# Altium PCB FAN_Unit_240316.PcbDoc
Units mil, origin at the board's own origin, x right, y up, seen from the top; angles counter-clockwise.
Board outline 4448.82 x 2165.35 mil, 2 copper layers (Top Layer, Bottom Layer); 48 components, 41 nets, 274 pads, 393 vias.
Unrouted connection lines stored in the file: 5.
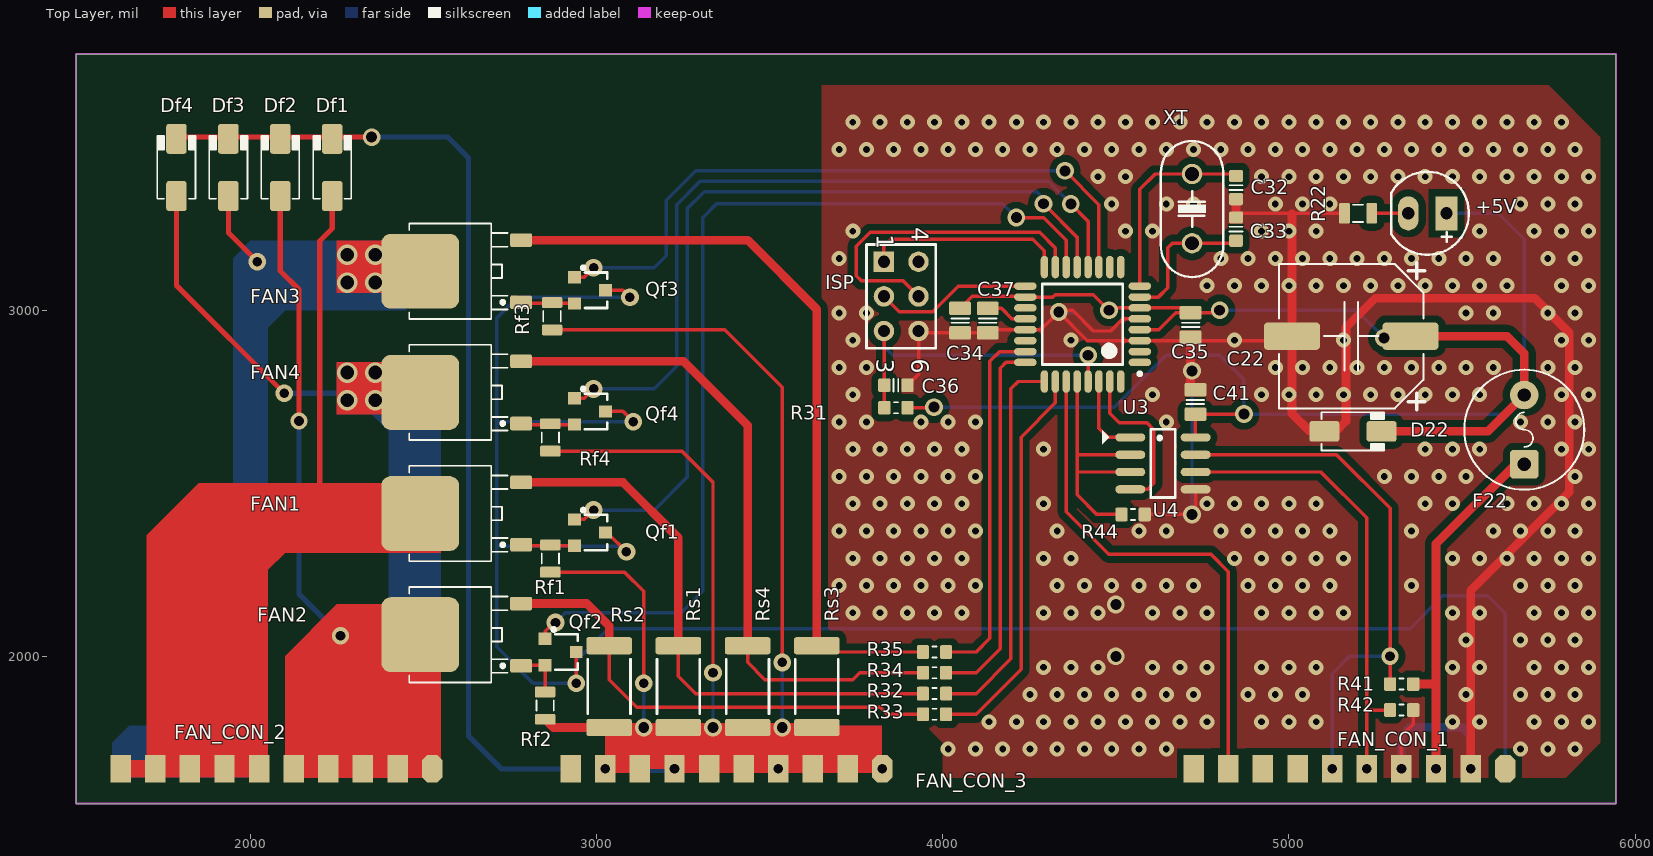
[diagram p0: Top Layer view]
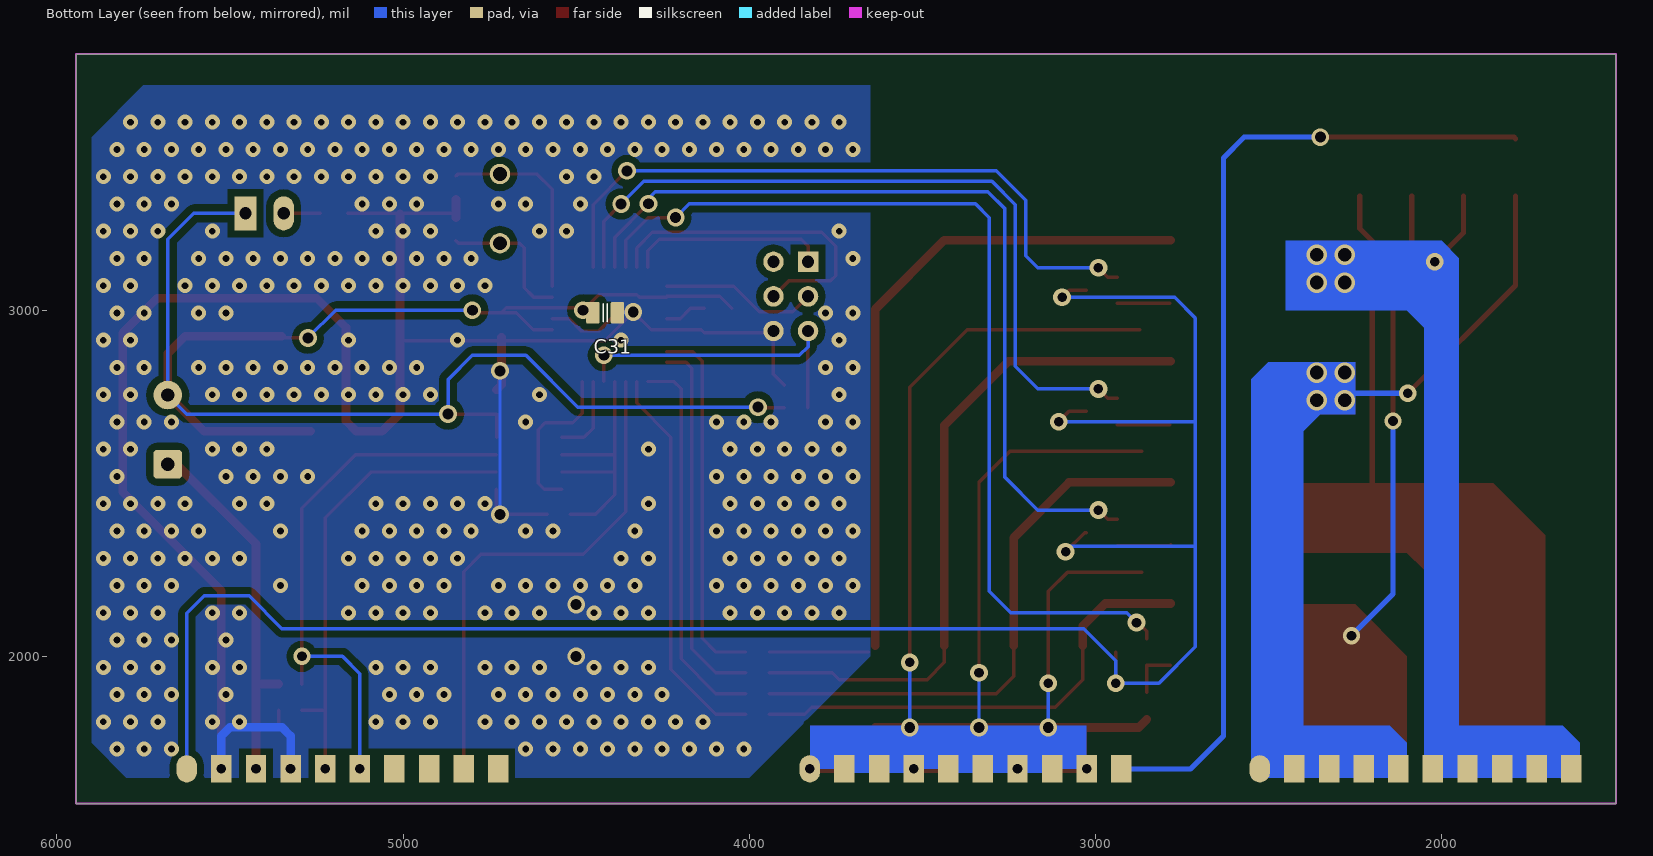
[diagram p1: Bottom Layer view, seen from below]
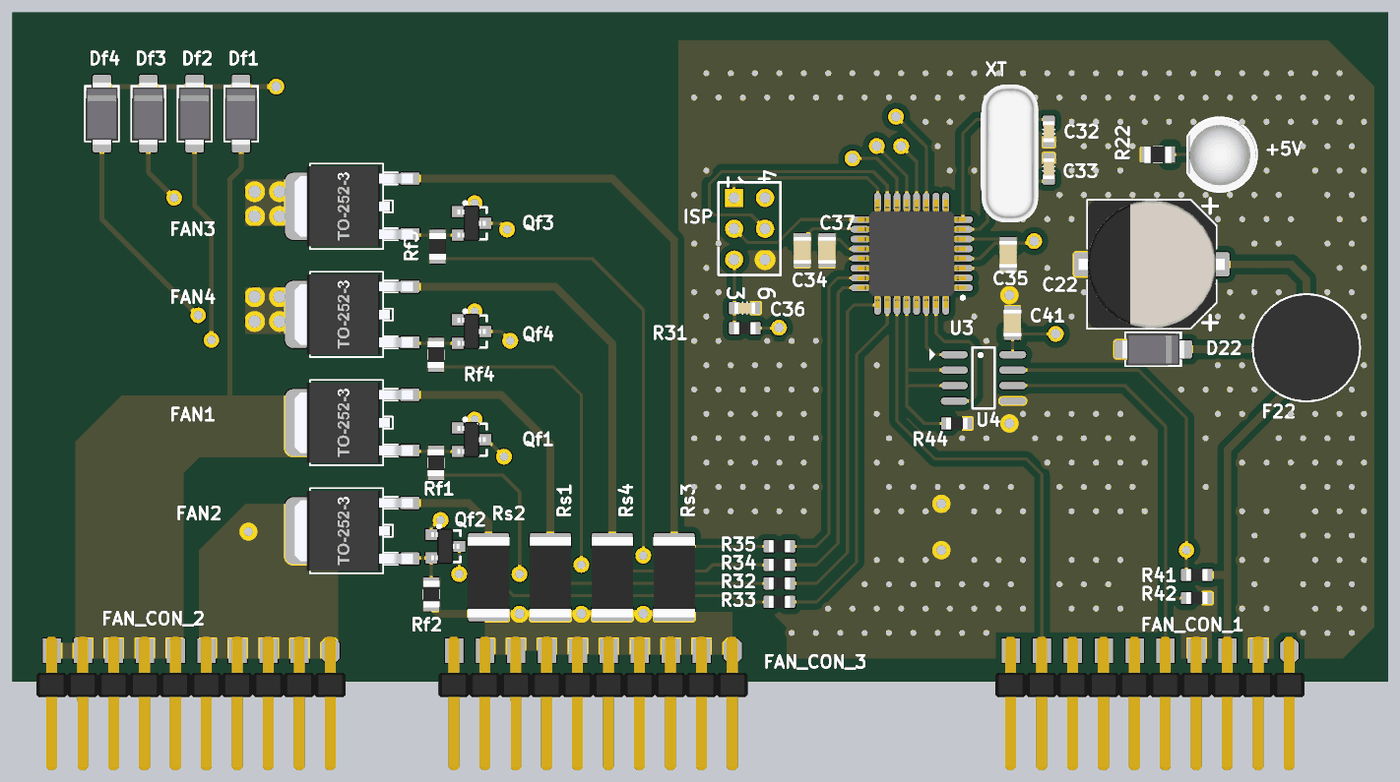
[diagram p2: 3D render of the assembled board from above, using the file's embedded part models]

## Layer stack, top to bottom
Top Solder: solder mask 0.4, Solder Resist, Dk 3.5
Top Layer: signal copper 1.4
Dielectric 1: dielectric 12.6, FR-4, Dk 4.8
Bottom Layer: signal copper 1.4
Bottom Solder: solder mask 0.4, Solder Resist, Dk 3.5

## Board outline
1496.06,1574.8 5944.88,1574.8 5944.88,3740.16 1496.06,3740.16

## Design rules (kind name [scope] priority, off if disabled: settings)
Clearance [All] p1: gap=10 except(8: Arc-SMDPad Track-SMDPad SMDPad-SMDPad; 20: Arc-Poly Track-Poly SMDPad-Poly THPad-Poly Via-Poly Fill-Poly Poly-Poly)
PlaneConnect [All] p1: planeconnectstyle=Direct reliefexpansion=20 reliefentries=4 reliefconductorwidth=10 reliefairgap=10
PolygonConnect [All] p1: connectstyle=Direct reliefconductorwidth=10 reliefentries=4 polygonreliefangle="90 Angle" airgapwidth=10
RoutingVias [All] p1: holewidth=28 width=50 viastyle="Through Hole" minholewidth=28 minwidth=50 maxholewidth=196.85 maxwidth=196.85
SolderMaskExpansion [All] p1: expansion=4
Width [All] p1: maxlimit=50 minlimit=10 preferedwidth=25
29 further rules are at their usual default settings.

## Components (designator, comment, footprint, x,y, rotation, side; value= is the part's Value field where it differs from the comment)
+5V "Led" "LED 5mm RED" 5400,3280 r180 top
C22 "2200uF/35V" CAP_ELEC_SIZE_G 5180,2925 r90 top
C31 "Cap" CAPC2012N_F#1 4416.22,2992.6 r180 bottom
C32 "CAP NP" CAPC1608N 4847.22,3354.35 r270 top
C33 "CAP NP" CAPC1608N 4847.22,3234.35 r90 top
C34 "Cap" CAPC2012N_F#2 4050,2970 r270 top
C35 "Cap" CAPC2012N_F#2 4715.83,2957.76 r270 top
C36 "CAP NP" CAPC1608N 3864.72,2783.35 r180 top
C37 "Cap" CAPC2012N_F#2 4130,2970 r270 top
C41 "100nF/104" CAPC2012N_F#2 4730,2735 r270 top
D22 "Diode" DO-214AC 5185,2650 r0 top
Df1 "Diode" DO-214AC 2236.22,3412.6 r90 top
Df2 "Diode" DO-214AC 2086.22,3412.6 r90 top
Df3 "Diode" DO-214AC 1936.22,3412.6 r90 top
Df4 "Diode" DO-214AC 1786.22,3412.6 r90 top
F22 "1.5A" FUSE_SR-5-BK 5680,2655 r90 top
FAN1 "NFET" TO-252 2636.22,2412.6 r90 top
FAN2 "NFET" TO-252 2636.22,2062.6 r90 top
FAN3 "NFET" TO-252 2636.22,3112.6 r90 top
FAN4 "NFET" TO-252 2636.22,2762.6 r90 top
FAN_CON_1 "Header 10X2A" OMC10 5625,1675 r180 top
FAN_CON_2 "Header 10X2A" OMC10 2525,1675 r180 top
FAN_CON_3 "Header 10X2A" OMC10 3825,1675 r180 top
ISP "Header 3X2A" HDR2X3_CEN 3830,3140 r270 top
Qf1 "C828" "SOT23 TOP" 2981.22,2357.6 r270 top
Qf2 "C828" "SOT23 TOP" 2896.22,2012.6 r270 top
Qf3 "C828" "SOT23 TOP" 2981.22,3057.6 r270 top
Qf4 "C828" "SOT23 TOP" 2981.22,2707.6 r270 top
R22 "Res_0805_1k" RESC2012N_F 5200,3280 r180 top
R31 "Res" RESC1608N_ZERO 3864.72,2718.35 r0 top
R32 "Res" RESC1608N_ZERO 3976.22,1892.6 r180 top
R33 "Res" RESC1608N_ZERO 3976.22,1832.6 r180 top
R34 "Res" RESC1608N_ZERO 3976.22,1952.6 r180 top
R35 "Res" RESC1608N_ZERO 3976.22,2012.6 r180 top
R41 "1k" RESC1608N_ZERO 5325.75,1920 r0 top
R42 "1k" RESC1608N_ZERO 5325.75,1845 r180 top
R44 "330R" RESC1608N_ZERO 4550,2410 r180 top
Rf1 "Res" RESC2012N_F 2866.22,2282.6 r90 top
Rf2 "Res" RESC2012N_F 2851.22,1857.6 r90 top
Rf3 "Res" RESC2012N_F 2871.22,2982.6 r90 top
Rf4 "Res" RESC2012N_F 2866.22,2632.6 r90 top
Rs1 "Res" RESC6332N 3236.22,1912.6 r90 top
Rs2 "Res" RESC6332N 3036.22,1912.6 r90 top
Rs3 "Res" RESC6332N 3636.22,1912.6 r90 top
Rs4 "Res" RESC6332N 3436.22,1912.6 r90 top
U3 "ATmega88PA" 32PIN 4403.94,2959.41 r180 top
U4 "MAX485" SO-8 4636.22,2557.6 r0 top
XT "20MHz" XT2 4720.22,3293.6 r90 top

## Footprints (in the part's own frame and the unit in brackets; to place one, negate y for a bottom-side part, rotate by r counter-clockwise, add the part's x,y. Pads: shape width x height; smd on the part's side, far side on the other; paste and mask are expansions set on the pad)
32PIN [mm]
  oval 1.65x0.55 smd: 1(-4.2,2.8) 2(-4.2,2) 3(-4.2,1.2) 4(-4.2,0.4) 5(-4.2,-0.4) 6(-4.2,-1.2) 7(-4.2,-2) 8(-4.2,-2.8) 17(4.2,-2.8) 18(4.2,-2) 19(4.2,-1.2) 20(4.2,-0.4) 21(4.2,0.4) 22(4.2,1.2) 23(4.2,2) 24(4.2,2.8)
  oval 0.55x1.65 smd: 9(-2.8,-4.2) 10(-2,-4.2) 11(-1.2,-4.2) 12(-0.4,-4.2) 13(0.4,-4.2) 14(1.2,-4.2) 15(2,-4.2) 16(2.8,-4.2) 25(2.8,4.2) 26(2,4.2) 27(1.2,4.2) 28(0.4,4.2) 29(-0.4,4.2) 30(-1.2,4.2) 31(-2,4.2) 32(-2.8,4.2)
  silkscreen extent -4.33,-2.95 2.95,3.75, body extent -4.5,-4.5 4.5,4.5, height 1.6
CAP_ELEC_SIZE_G [mm] "Capacitor, polarized, aluminum can; 10.0x10.2mm DxH"
  round 0.635 on Mech14: 0(0,0)
  rrect25% 2x4.1 smd: 1(0,-4.35) 2(0,4.35)
  silkscreen extent -5.4,-5.4 5.4,5.3, body extent -5.25,-6 5.25,6, height 10.5
CAPC1608N [mm] "Chip Capacitor, Body 1.6x0.8mm, 0603, IPC Medium Density"
  round 0.254 on Mech14: 0(0,0)
  rrect25% 0.9x1 smd: 1(-0.85,0) 2(0.85,0)
  Top Layer pour cut-out: -0.4,0.6 0.4,0.6 0.4,-0.6 -0.4,-0.6
  silkscreen extent -0.18,-0.48 0.18,0.48, body extent -0.85,-0.45 0.85,0.45, height 0.89
CAPC2012N_F#1 [mm] "Chip Capacitor, Body 2.0x1.2mm, 0805, IPC Medium Density, for Flex circuits"
  round 0.254 on Mech14: 0(0,0)
  rrect25% 1.2x1.4 on Bottom Solder: 1(-0.9,0) 1(0.9,0)
  rrect25% 1x1.6 smd paste-1: 1(-0.9,0) 2(0.9,0)
  rrect25% 1x1.4 on Bottom Paste: 1(-0.9,0) 1(0.9,0)
  Top Layer pour cut-out: -0.4,0.8 0.4,0.8 0.4,-0.8 -0.4,-0.8
  silkscreen extent -0.15,-0.65 0.15,0.65, body extent -1.1,-0.72 1.1,0.73, height 1.34
CAPC2012N_F#2 [mm] "Chip Capacitor, Body 2.0x1.2mm, 0805, IPC Medium Density, for Flex circuits"
  round 0.254 on Mech14: 0(0,0)
  rrect25% 1.2x1.4 on Top Solder: 1(-0.9,0) 1(0.9,0)
  rrect25% 1x1.6 smd paste-1: 1(-0.9,0) 2(0.9,0)
  rrect25% 1x1.4 on Top Paste: 1(-0.9,0) 1(0.9,0)
  Top Layer pour cut-out: -0.4,0.8 0.4,0.8 0.4,-0.8 -0.4,-0.8
  silkscreen extent -0.15,-0.65 0.15,0.65, body extent -1.1,-0.72 1.1,0.73, height 1.34
DO-214AC [mm] "JEDEC DO214 variation AC. SMA"
  round 0.508 on Mech14: 0(0,0)
  rrect25% 2.2x1.5 smd: A(-2.1,0) K(2.1,0)
  silkscreen extent -2.3,-1.4 2.3,1.4, body extent -2.6,-1.3 2.6,1.3, height 2.42
FUSE_SR-5-BK [mm]
  round 0.5 on Mech14: 0(0,0)
  rrect25% 2.1x2.1 hole 0.965: 1(-2.54,0)
  round 2.1 hole 0.965: 2(2.54,0)
  silkscreen extent -4.4,-4.4 4.4,4.4, body extent -4.35,-4.32 4.35,4.32, height 8.29
HDR2X3_CEN [mm] "Connector; Header; 3x2 Position"
  rect 1.5x1.5 hole 0.9: 1(0,0)
  round 1.5 hole 0.9: 2(2.54,0) 3(5.08,0) 4(0,2.54) 5(2.54,2.54) 6(5.08,2.54)
  silkscreen extent -1.27,-1.27 6.35,3.81
"LED 5mm RED" [mm]
  rect 1.6x2.5 hole 0.9: A(-1.397,0)
  oval 1.5x2.5 hole 0.9: K(1.397,0)
  silkscreen extent -3.04,-3.05 2.64,3.04, body extent -2.94,-2.97 2.48,3.05, height 12.31
OMC10 [mm]
  oct 1.5x2 smd: 1(0,0)
  rect 1.5x2 smd: 2(2.54,0) 3(5.08,0) 4(7.62,0) 5(10.16,0) 6(12.7,0) 7(15.24,0) 8(17.78,0) 9(20.32,0) 10(22.86,0)
  oval 1.5x2 smd far side: 11(0,0)
  rect 1.5x2 smd far side: 12(2.54,0) 13(5.08,0) 14(7.62,0) 15(10.16,0) 16(12.7,0) 17(15.24,0) 18(17.78,0) 19(20.32,0) 20(22.86,0)
  body extent -1.24,-1.18 24.16,9.82, height 2.33
RESC1608N_ZERO [mm] "Chip Resistor, Body 1.6x0.8mm, 0603, IPC Medium Density"
  round 0.254 on Mech14: 0(0,0)
  rrect25% 0.9x1 smd: 1(-0.85,0) 2(0.85,0)
  Top Layer pour cut-out: -0.4,0.6 0.4,0.6 0.4,-0.6 -0.4,-0.6
  silkscreen extent -0.15,-0.41 0.15,0.41, body extent -0.87,-0.47 0.88,0.48, height 0.54
RESC2012N_F [mm] "Chip Resistor, Body 2.0x1.2mm, 0805, IPC Medium Density"
  round 0.254 on Mech14: 0(0,0)
  rrect25% 1x1.3 on Top Solder: 1(-1,0) 1(1,0)
  rrect25% 0.8x1.5 smd paste-1: 1(-1,0) 2(1,0)
  rrect25% 0.8x1.3 on Top Paste: 1(-1,0) 1(1,0)
  Top Layer pour cut-out: -0.6,0.75 0.6,0.75 0.6,-0.75 -0.6,-0.75
  silkscreen extent -0.38,-0.64 0.38,0.64, body extent -1.1,-0.67 1.1,0.68, height 0.69
RESC6332N [mm] "Chip Resistor, Body 6.3x3.2mm, 2512, IPC Medium Density"
  round 1 on Mech14: 0(0,0)
  rrect25% 1.25x3.35 smd: 1(-3,0) 2(3,0)
  silkscreen extent -2,-1.58 2,1.58, body extent -3.3,-1.7 3.3,1.7, height 0.69
SO-8 [mm] "8-Pin Small Outline Integrated Circuit 1.27 mm Pitch, IPC Medium Density"
  oval 2.2x0.6 smd: 1(-2.4,1.905) 2(-2.4,0.635) 3(-2.4,-0.635) 4(-2.4,-1.905) 5(2.4,-1.905) 6(2.4,-0.635) 7(2.4,0.635) 8(2.4,1.905)
  silkscreen extent -4.44,-2.5 0.9,2.5, body extent -1.95,-2.45 1.95,2.45, height 1.75
"SOT23 TOP" [mm]
  rect 0.9x0.95 smd: 1(-0.965,-1.143) 2(0,1.143) 3(0.965,-1.143)
  silkscreen extent -1.77,-0.63 1.3,1.25, body extent -1.46,-1.17 1.46,1.17, height 1
TO-252 [mm] "D-PAK/TO-252-AA; 3 Leads (1 Cropped); Body 10.3 (inc. leads) x 6.7 mm (LxW max)"
  round 0.5 on Mech14: 0(0,0)
  rrect25% 1x1.6 smd: 1(-2.285,-3.7) 3(2.285,-3.7)
  rrect25% 5.5x5.7 smd: 4(0,3.7)
  silkscreen extent -3.5,-2.7 3.5,4.5, body extent -3.3,-3.95 3.3,5.76, height 2.31
XT2 [mm]
  round 1.5 hole 1: 1(-2.54,0) 2(2.54,0)
  silkscreen extent -5.03,-2.29 4.96,2.29, body extent -5.93,-2.36 5.42,2.29, height 3.5

## Part data
C22: library part CP4, "Cap 1000uF/16V - 220uF/50V"
C41: library part "CAP NP"
F22: library part Fuse
FAN_CON_1 FAN_CON_2 FAN_CON_3: "Header, 10-Pin, Dual row"
ISP: "Header, 3-Pin, Dual row"
Qf1 Qf2 Qf3 Qf4: library part NPN, "Transistor C828 C1815...."
R22: library part Res
R41 R42 R44: library part Res, "Tro dan"
U3: library part ATmega48/168/328, "ATmega48/168/328"
U4: "RS232 - RS485 (Same sn75176)"
XT: library part Crystal

## Via types
v1: diameter 43.31, hole 19.68, Top Layer to Bottom Layer, tented both sides, 341 vias
v2: diameter 51.18, hole 31.5, Top Layer to Bottom Layer, 19 vias
v3: diameter 50, hole 28, Top Layer to Bottom Layer, 14 vias
v4: diameter 51.18, hole 27.56, Top Layer to Bottom Layer, 11 vias
v5: diameter 59.06, hole 39.37, Top Layer to Bottom Layer, 8 vias

## Nets (pads, with @x,y where several pads share a name; then routed paths per layer and width w, separated by ;. In a path a pad name is that pad's centre, name@x,y a point inside that pad or via, vN(x,y) a via of type N, cw(c..) or ccw(c..) an arc to the next point about the centre after c; other vN are vias at no path point)
+3V3: FAN_CON_1.7 FAN_CON_1.17
+5V_IN: F22.1 FAN_CON_1.3 FAN_CON_1.13 R41.2 | length 1061.1
  Top Layer w25: R41.2 5420,1920 ; v3(5425,1675) 5425,2325 5655,2555 F22.1
+12V_IN: FAN_CON_1.1 FAN_CON_1.11 Qf1.2 Qf2.2 Qf3.2 Qf4.2 | length 6057.2
  Top Layer w10: v4(2941.22,1922.6) Qf2.2 ; Qf1.2 3031.22,2357.6 v4(3086.22,2302.6) v4@3081.22,2302.6 ; Qf4.2 3076.22,2707.6 v4(3106.22,2677.6) ; Qf3.2 3076.22,3057.6 v4(3096.22,3037.6)
  Bottom Layer w10: v4(3086.22,2302.6) 3071.22,2317.6 2711.22,2317.6 ; v4(3096.22,3037.6) 2771.22,3037.6 2711.22,2977.6 2711.22,2672.6 ; v4(3106.22,2677.6) 2716.22,2677.6 2711.22,2672.6 ; FAN_CON_1.11 5625,2125 5575,2175 5445,2175 5350,2080 3033.62,2080 2941.22,1987.6 v4(2941.22,1922.6) 2816.22,1922.6 2711.22,2027.6 2711.22,2317.6 ; 2711.22,2317.6 2711.22,2672.6
+48V_IN: Df1.K Df2.K Df3.K Df4.K FAN_CON_3.10 FAN_CON_3.20 | length 2874.9
  Top Layer w15: Df4.K 1790.94,3500 2236.22,3500 v2(2350,3500)
  Bottom Layer w15: v2(2350,3500) 2570,3500 2630,3440 2630,1770 2725,1675 FAN_CON_3.20
ADC_FAN1: R32.1 U3.25 | length 1114.3
  Top Layer w10: R32.1 4096.22,1892.6 4196.22,1992.6 4196.22,2772.6 4217.68,2794.05 U3.25
ADC_FAN2: R33.1 U3.26 | length 1142.8
  Top Layer w10: R33.1 4096.22,1832.6 4226.22,1962.6 4226.22,2633.62 4325.2,2732.6 U3.26
ADC_FAN3: R34.1 U3.24 | length 1074.8
  Top Layer w10: R34.1 4096.22,1952.6 4166.22,2022.6 4166.22,2832.6 4182.8,2849.17 U3.24
ADC_FAN4: R35.1 U3.23 | length 1057.1
  Top Layer w10: R35.1 4096.22,2012.6 4136.22,2052.6 4136.22,2852.6 4164.29,2880.67 U3.23
AREF: C37.1@4130,3005.43 U3.20 | length 121.1
  Top Layer w10: C37.1@4130,3005.43 4169.57,3005.43 4199.84,2975.16 U3.20
FAN1_CONTROL: Qf1.1 U3.13 | length 2443.8
  Top Layer w10: Qf1.1 2964.22,2395.6 v4(2991.22,2422.6) ; v2(4291.34,3307.72) 4291.34,3307.09 4388.19,3210.24 U3.13
  Bottom Layer w10: v4(2991.22,2422.6) 3166.22,2422.6 3261.22,2517.6 3261.22,3292.6 3311.22,3342.6 4271.22,3342.6 v2@4298.72,3315.1 ; v2@4291.34,3307.09 v2(4291.34,3307.72)
FAN1_OUT: Df1.A FAN1.4 FAN_CON_2.6 FAN_CON_2.7 FAN_CON_2.8 FAN_CON_2.9 FAN_CON_2.10 | length 1353.2
  Top Layer w15: 2180,2400 2200,2420 2200,3200 2236.22,3236.22 Df1.A
  Top Layer w50: FAN_CON_2.10 FAN_CON_2.9 FAN_CON_2.8 FAN_CON_2.7 FAN_CON_2.6
FAN2_CONTROL: Qf2.1 U3.14 | length 2792
  Top Layer w10: Qf2.1 2851.22,2072.6 2876.22,2097.6 v4(2881.22,2097.6) ; v2(4212.6,3267.72) 4291.34,3267.72 4356.69,3202.36 U3.14
  Bottom Layer w10: v4(2881.22,2097.6) 2909.61,2125.98 3244.61,2125.98 3307.09,2188.46 3307.09,3267.72 3346.46,3307.09 4173.23,3307.09 v2(4212.6,3267.72)
FAN2_OUT: Df2.A FAN2.4 FAN_CON_2.1 FAN_CON_2.2 FAN_CON_2.3 FAN_CON_2.4 FAN_CON_2.5 | length 2095.1
  Top Layer w15: Df2.A 2086.22,3113.78 2140,3060 v3(2140,2680)
  Top Layer w50: FAN_CON_2.5 FAN_CON_2.4 FAN_CON_2.3 FAN_CON_2.2 FAN_CON_2.1 FAN2.4@2525,2028.15
  Bottom Layer w15: v3(2140,2680) 2140,2180 v3(2260,2060)
FAN3_CONTROL: Qf3.1 U3.11 | length 1956.3
  Top Layer w10: Qf3.1 2964.22,3095.6 v4(2991.22,3122.6) ; v2(4353.31,3402.6) 4451.18,3304.72 U3.11
  Bottom Layer w10: v4(2991.22,3122.6) 3166.22,3122.6 3201.22,3157.6 3201.22,3317.45 3286.37,3402.6 v2(4353.31,3402.6)
FAN3_OUT: Df3.A FAN3.4 FAN_CON_2.16 FAN_CON_2.17 FAN_CON_2.18 FAN_CON_2.19 FAN_CON_2.20 | length 618.5
  Top Layer w15: Df3.A 1936.22,3223.78 v3(2020,3140)
  Bottom Layer w50: FAN_CON_2.20@1636.22,1662.6 1648.62,1675 FAN_CON_2.19 FAN_CON_2.18 FAN_CON_2.17 FAN_CON_2.16
  other v5: 2280,3080 2360,3080 2280,3160 2360,3160
FAN4_CONTROL: Qf4.1 U3.12 | length 2197.4
  Top Layer w10: Qf4.1 2964.22,2745.6 v4(2991.22,2772.6) ; v2(4370.08,3307.09) 4419.69,3257.48 U3.12
  Bottom Layer w10: v4(2991.22,2772.6) 3166.22,2772.6 3231.22,2837.6 3231.22,3305.02 3298.79,3372.6 4304.57,3372.6 v2(4370.08,3307.09)
FAN4_OUT: Df4.A FAN4.4 FAN_CON_2.11 FAN_CON_2.12 FAN_CON_2.13 FAN_CON_2.14 FAN_CON_2.15 | length 1278.4
  Top Layer w15: Df4.A 1786.22,3071.28 v3(2097.5,2760)
  Bottom Layer w15: v3(2097.5,2760) 2260,2760 v5(2280,2740)
  Bottom Layer w50: FAN_CON_2.15 FAN_CON_2.14 ; FAN_CON_2.14@2236.22,1675 FAN_CON_2.13 FAN_CON_2.12 FAN_CON_2.11
  other v5: 2360,2740 2280,2820 2360,2820
GND: C22.2 C31.2 C32.2 C33.2 C34.2 C35.2 C36.1 C37.2 C41.1@4730,2770.43 D22.A FAN_CON_1.2 FAN_CON_1.4 FAN_CON_1.12 FAN_CON_1.14 ISP.6 R22.2 R42.1 R44.1 U3.3 U3.5 U3.21 U4.5 | length 6479.3
  Top Layer w10: C36.1 3930,2815.16 ISP.6@3930,2934.57 ; ISP.6@3935.43,2934.57 C34.2 C37.2 4139.09,2943.66 U3.21 4283.66,2943.66 v2(4335,2995) ; U3.5 4520.16,2975.16 4485,2940 4435,2940 4375,3000 4340,3000 v2(4335,2995) ; R44.1 v2(4720,2410) 4730.71,2420.71 U4.5 ; C33.2@4859.41,3280 R22.2 ; C22.2@4995.91,2912.17 4715.83,2912.17 U3.3 4417.83,2912.17 v2(4335,2995) ; v3(5325,1675) 5325,1770 5359.21,1804.21 R42.1
  Top Layer w25: C35.2 4715.83,2912.17 4715.83,2784.61 C41.1@4730,2770.43 ; C33.2 C32.2 ; 5008.74,3278.72 5008.74,3149.61 C22.2 5008.74,2701.26 5060,2650 D22.A 5135,2650 5165,2680 5165,2950 5250,3035 5710,3035 5810,2935 5810,2755.91 5810,2475 5525,2190 5525,2125.99 5525,1889.76 v3(5525,1675)
  Bottom Layer w10: v2(4335,2995) 4337.4,2992.6 C31.2 ; v2(4720,2410) v2(4720,2825)
  Bottom Layer w25: v3(5325,1675) 5325,1770 5350,1795 5500,1795 5525,1770 v3(5525,1675)
  other v1: 4015.75,1732.28 4094.49,1732.28 4173.23,1732.28 4251.97,1732.28 4330.71,1732.28 4409.45,1732.28 4488.19,1732.28 4566.93,1732.28 4645.67,1732.28 5669.29,1732.28 5748.03,1732.28 5826.77,1732.28 4133.86,1811.02 4212.6,1811.02 4291.34,1811.02 4370.08,1811.02 4448.82,1811.02 4527.56,1811.02 4606.3,1811.02 4685.04,1811.02 4763.78,1811.02 4921.26,1811.02 5000,1811.02 5078.74,1811.02 5472.44,1811.02 5551.18,1811.02 5708.66,1811.02 5787.4,1811.02 5866.14,1811.02 4251.97,1889.76 4330.71,1889.76 4409.45,1889.76 4488.19,1889.76 4566.93,1889.76 4645.67,1889.76 4724.41,1889.76 4881.89,1889.76 4960.63,1889.76 5039.37,1889.76 5511.81,1889.76 5669.29,1889.76 5748.03,1889.76 5826.77,1889.76 4291.34,1968.51 4370.08,1968.51 4448.82,1968.51 4606.3,1968.51 4685.04,1968.51 4763.78,1968.51 4921.26,1968.51 5000,1968.51 5078.74,1968.51 5472.44,1968.51 5551.18,1968.51 5708.66,1968.51 5787.4,1968.51 5866.14,1968.51 5511.81,2047.25 5669.29,2047.25 5748.03,2047.25 5826.77,2047.25 3740.16,2125.99 3818.9,2125.99 3897.64,2125.99 3976.38,2125.99 4055.12,2125.99 4291.34,2125.99 4370.08,2125.99 4448.82,2125.99 4606.3,2125.99 4685.04,2125.99 4763.78,2125.99 4921.26,2125.99 5000,2125.99 5078.74,2125.99 5157.48,2125.99 5472.44,2125.99 5551.18,2125.99 5708.66,2125.99 5787.4,2125.99 5866.14,2125.99 3700.79,2204.73 3779.53,2204.73 3858.27,2204.73 3937.01,2204.73 4015.75,2204.73 4094.49,2204.73 4330.71,2204.73 4409.45,2204.73 4488.19,2204.73 4566.93,2204.73 4645.67,2204.73 4724.41,2204.73 4881.89,2204.73 4960.63,2204.73 5039.37,2204.73 5118.11,2204.73 5354.33,2204.73 5669.29,2204.73 5748.03,2204.73 5826.77,2204.73 3740.16,2283.47 3818.9,2283.47 3897.64,2283.47 3976.38,2283.47 4055.12,2283.47 4291.34,2283.47 4370.08,2283.47 4842.52,2283.47 4921.26,2283.47 5000,2283.47 5078.74,2283.47 5157.48,2283.47 5472.44,2283.47 5551.18,2283.47 5629.92,2283.47 5708.66,2283.47 5787.4,2283.47 5866.14,2283.47 3700.79,2362.21 3779.53,2362.21 3858.27,2362.21 3937.01,2362.21 4015.75,2362.21 4094.49,2362.21 4330.71,2362.21 4566.93,2362.21 4645.67,2362.21 4803.15,2362.21 4881.89,2362.21 4960.63,2362.21 5039.37,2362.21 5118.11,2362.21 5354.33,2362.21 5590.55,2362.21 5669.29,2362.21 5748.03,2362.21 5826.77,2362.21 3740.16,2440.95 3818.9,2440.95 3897.64,2440.95 3976.38,2440.95 4055.12,2440.95 4291.34,2440.95 4763.78,2440.95 4842.52,2440.95 4921.26,2440.95 5000,2440.95 5078.74,2440.95 5393.7,2440.95 5472.44,2440.95 5629.92,2440.95 5708.66,2440.95 5787.4,2440.95 5866.14,2440.95 3700.79,2519.69 3779.53,2519.69 3858.27,2519.69 3937.01,2519.69 4015.75,2519.69 4094.49,2519.69 5275.59,2519.69 5354.33,2519.69 5433.07,2519.69 5511.81,2519.69 5826.77,2519.69 3740.16,2598.43 3818.9,2598.43 3897.64,2598.43 3976.38,2598.43 4055.12,2598.43 4291.34,2598.43 5393.7,2598.43 5472.44,2598.43 5551.18,2598.43 5787.4,2598.43 5866.14,2598.43 3700.79,2677.17 3779.53,2677.17 3937.01,2677.17 4015.75,2677.17 4094.49,2677.17 4645.67,2677.17 5669.29,2677.17 5748.03,2677.17 5826.77,2677.17 3740.16,2755.91 4606.3,2755.91 4921.26,2755.91 5000,2755.91 5078.74,2755.91 5157.48,2755.91 5236.22,2755.91 5314.96,2755.91 5393.7,2755.91 5472.44,2755.91 5551.18,2755.91 5787.4,2755.91 5866.14,2755.91 3700.79,2834.65 3779.53,2834.65 4960.63,2834.65 5039.37,2834.65 5118.11,2834.65 5196.85,2834.65 5275.59,2834.65 5354.33,2834.65 5433.07,2834.65 5511.81,2834.65 5590.55,2834.65 5748.03,2834.65 5826.77,2834.65 3740.16,2913.39 4370.08,2913.39 4842.52,2913.39 5157.48,2913.39 5787.4,2913.39 5866.14,2913.39 3700.79,2992.13 3779.53,2992.13 5511.81,2992.13 5590.55,2992.13 5748.03,2992.13 5826.77,2992.13 4763.78,3070.87 4842.52,3070.87 4921.26,3070.87 5000,3070.87 5078.74,3070.87 5157.48,3070.87 5236.22,3070.87 5314.96,3070.87 5393.7,3070.87 5472.44,3070.87 5551.18,3070.87 5629.92,3070.87 5787.4,3070.87 5866.14,3070.87 3700.79,3149.61 4803.15,3149.61 4881.89,3149.61 4960.63,3149.61 5039.37,3149.61 5118.11,3149.61 5196.85,3149.61 5275.59,3149.61 5354.33,3149.61 5433.07,3149.61 5511.81,3149.61 5590.55,3149.61 5748.03,3149.61 5826.77,3149.61 3740.16,3228.35 4527.56,3228.35 4606.3,3228.35 4921.26,3228.35 5000,3228.35 5078.74,3228.35 5551.18,3228.35 5708.66,3228.35 5787.4,3228.35 5866.14,3228.35 4488.19,3307.09 4645.67,3307.09 4724.41,3307.09 4960.63,3307.09 5039.37,3307.09 5118.11,3307.09 5669.29,3307.09 5748.03,3307.09 5826.77,3307.09 4448.82,3385.83 4527.56,3385.83 4921.26,3385.83 5000,3385.83 5078.74,3385.83 5157.48,3385.83 5236.22,3385.83 5314.96,3385.83 5393.7,3385.83 5472.44,3385.83 5551.18,3385.83 5629.92,3385.83 5708.66,3385.83 5787.4,3385.83 5866.14,3385.83 3700.79,3464.57 3779.53,3464.57 3858.27,3464.57 3937.01,3464.57 4015.75,3464.57 4094.49,3464.57 4173.23,3464.57 4251.97,3464.57 4330.71,3464.57 4409.45,3464.57 4488.19,3464.57 4566.93,3464.57 4645.67,3464.57 4724.41,3464.57 4803.15,3464.57 4881.89,3464.57 4960.63,3464.57 5039.37,3464.57 5118.11,3464.57 5196.85,3464.57 5275.59,3464.57 5354.33,3464.57 5433.07,3464.57 5511.81,3464.57 5590.55,3464.57 5669.29,3464.57 5748.03,3464.57 5826.77,3464.57 3740.16,3543.31 3818.9,3543.31 3897.64,3543.31 3976.38,3543.31 4055.12,3543.31 4133.86,3543.31 4212.6,3543.31 4291.34,3543.31 4370.08,3543.31 4448.82,3543.31 4527.56,3543.31 4606.3,3543.31 4685.04,3543.31 4763.78,3543.31 4842.52,3543.31 4921.26,3543.31 5000,3543.31 5078.74,3543.31 5157.48,3543.31 5236.22,3543.31 5314.96,3543.31 5393.7,3543.31 5472.44,3543.31 5551.18,3543.31 5629.92,3543.31 5708.66,3543.31 5787.4,3543.31
  other v2: 4500,2000 4500,2150
IDC: FAN_CON_1.9 FAN_CON_1.19 U3.27 | length 1485.8
  Top Layer w10: U3.27 4356.69,2418.31 4480,2295 4775,2295 4825,2245 FAN_CON_1.9
MCU_RX: U3.30 U4.1 | length 236.6
  Top Layer w10: U3.30 4451.18,2658.82 4477.4,2632.6 U4.1
MCU_TX: U3.31 U4.4 | length 469.1
  Top Layer w10: U3.31 4482.68,2702.32 4510,2675 4590,2675 4610,2655 4610,2500 4592.6,2482.6 U4.4
MISO: ISP.1 U3.16 | length 577.5
  Top Layer w10: ISP.1 3830,3185 3850,3205 4260,3205 4293.7,3171.3 U3.16
MOSI: ISP.5 U3.15 | length 955.4
  Top Layer w10: ISP.5 3885.47,3084.53 3765.47,3084.53 3750,3100 3750,3185 3790,3225 4280,3225 4325.2,3179.8 U3.15
Net+5V_2: +5V.K R22.1@5239.37,3280 | length 105.6
  Top Layer w10: R22.1@5239.37,3280 +5V.K
NetFAN1_1: FAN1.1 Qf1.3 Rf1.2 | length 155.6
  Top Layer w10: FAN1.1 2784.93,2319.6 Qf1.3
NetFAN2_1: FAN2.1 Qf2.3 Rf2.2 | length 145
  Top Layer w10: FAN2.1@2783.85,1974.6 Qf2.3 Rf2.2
NetFAN3_1: FAN3.1 Qf3.3 Rf3.2 | length 151.3
  Top Layer w10: FAN3.1@2784.93,3019.6 Qf3.3
NetFAN4_1: FAN4.1 Qf4.3 Rf4.2 | length 151.3
  Top Layer w10: FAN4.1@2784.93,2669.6 Qf4.3
PGND: FAN_CON_3.1 FAN_CON_3.2 FAN_CON_3.3 FAN_CON_3.4 FAN_CON_3.5 FAN_CON_3.6 FAN_CON_3.7 FAN_CON_3.8 FAN_CON_3.9 FAN_CON_3.11 FAN_CON_3.12 FAN_CON_3.13 FAN_CON_3.14 FAN_CON_3.15 FAN_CON_3.16 FAN_CON_3.17 FAN_CON_3.18 FAN_CON_3.19 Rf1.1@2866.22,2243.23 Rf2.1@2851.22,1818.23 Rf3.1@2871.22,2943.23 Rf4.1@2866.22,2593.23 Rs1.1 Rs2.1 Rs3.1 Rs4.1 | length 5852.3
  Top Layer w10: Rf1.1@2866.22,2243.23 3080.59,2243.23 3136.22,2187.6 v4(3136.22,1922.6) ; Rf4.1@2866.22,2593.23 3245.59,2593.23 3336.22,2502.6 v4(3336.22,1952.6) ; Rf3.1@2871.22,2943.23 3370.59,2943.23 3536.22,2777.6 v4(3536.22,1982.6)
  Top Layer w25: Rf2.1@2851.22,1818.23 2874.96,1794.49 Rs2.1 ; v3(3025,1675) FAN_CON_3.9@3036.22,1675 ; FAN_CON_3.8 FAN_CON_3.9@3036.22,1675 ; v3(3225,1675) FAN_CON_3.6 FAN_CON_3.5 v3(3525,1675) FAN_CON_3.3 FAN_CON_3.2 v3(3825,1675) ; Rs3.1 v2(3536.22,1794.49) Rs4.1 v2(3336.22,1794.49) Rs1.1 v2(3136.22,1794.49) Rs2.1 ; FAN_CON_3.9@3036.22,1675 Rs2.1
  Bottom Layer w10: FAN_CON_3.18@3136.22,1675 v2(3136.22,1794.49) v4(3136.22,1922.6) ; v2(3336.22,1794.49) v4(3336.22,1952.6) ; v2(3536.22,1794.49) v4(3536.22,1982.6)
  Bottom Layer w25: FAN_CON_3.18 3136.22,1675 v3(3225,1675) FAN_CON_3.16 FAN_CON_3.15 ; v3(3525,1675) FAN_CON_3.13 FAN_CON_3.12
RS485A: FAN_CON_1.5 FAN_CON_1.15 R42.2 U4.6 | length 1341.5
  Top Layer w10: U4.6 5092.4,2532.6 5225,2400 5225,1845 ; v3(5225,1675) 5225,1845 ; R42.2 5225,1845
RS485B: FAN_CON_1.6 FAN_CON_1.16 R41.1 U4.7 | length 1596.4
  Top Layer w10: U4.7 5137.4,2582.6 5292.28,2427.72 v3(5292.28,2000) R41.1
  Bottom Layer w10: v3(5125,1675) 5125,1950 5175,2000 v3(5292.28,2000)
RS485D: R44.2 U3.28 U4.2 U4.3 | length 781.2
  Top Layer w10: U3.28 4388.19,2466.81 4445,2410 R44.2 ; 4390.59,2532.6 U4.3 ; 4390.79,2582.6 U4.2
RST: C36.2 ISP.3 R31.1 U3.29 | length 941.8
  Top Layer w10: R31.1 ISP.3@3831.26,2938.74 ; U3.29 4419.69,2869.68 v2(4420,2870)
  Bottom Layer w10: ISP.3 3830,2895 3855,2870 v2(4420,2870)
SCK: ISP.2 U3.17 | length 457.8
  Top Layer w10: ISP.2 3874.53,2995.47 3970.53,2995.47 4044.7,3069.65 U3.17
SEN_FAN1: FAN1.3 R32.2 Rs1.2 | length 1647.8
  Top Layer w10: Rs1.2 3236.22,1942.6 3286.22,1892.6 R32.2
  Top Layer w25: FAN1.3 3076.26,2502.56 3236.22,2342.6 Rs1.2
SEN_FAN2: FAN2.3 R33.2 Rs2.2 | length 1384.2
  Top Layer w10: Rs2.2 3036.22,1932.6 3116.22,1852.6 3820,1852.6 3840,1832.6 R33.2
  Top Layer w25: FAN2.3 2971.26,2152.56 3036.22,2087.6 Rs2.2
SEN_FAN3: FAN4.3 R34.2 Rs4.2 | length 1951.5
  Top Layer w10: Rs4.2 3436.22,1982.6 3486.22,1932.6 3740,1932.6 3760,1952.6 R34.2
  Top Layer w25: FAN4.3 3251.26,2852.56 3436.22,2667.6 Rs4.2
SEN_FAN4: FAN3.3 R35.2 Rs3.2 | length 2197.5
  Top Layer w10: Rs3.2@3654.33,2012.6 R35.2
  Top Layer w25: FAN3.3 3436.26,3202.56 3636.22,3002.6 Rs3.2
VCC: +5V.A C22.1 C31.1@4451.65,2992.6 C34.1@4050,3005.43 C35.1@4715.83,2993.19 C41.2 D22.K F22.2 ISP.4 R31.2 U3.4 U3.6 U3.18 U4.8 | length 5370.2
  Top Layer w10: R31.2 3973.35,2718.35 v2(3975,2720) ; C34.1@4050,3005.43 4084.69,3040.12 4238.58,3040.12 U3.18 4318.15,3038.15 4325,3045 4435,3045 v2(4480,3000) ; v2@4486.65,3006.65 U3.6 4702.36,3006.65 C35.1@4715.83,2993.19 ; U3.4 4623.66,2943.66 4673.19,2993.19 C35.1@4715.83,2993.19 ; U4.8@4730,2633.31 C41.2 4869.57,2699.57 v2(4870,2700) ; v2(4800,3000) 4793.19,2993.19 C35.1@4715.83,2993.19 ; v2(5275,2920) C22.1@5346.26,2920
  Top Layer w25: D22.K 5575,2650 F22.2 5680,2875 5630,2925 C22.1
  Bottom Layer w10: v2(3975,2720) 4495,2720 4645,2870 4800,2870 4870,2800 v2(4870,2700) 5625,2700 F22.2 5680,3205 5605,3280 +5V.A ; v2(4800,3000) 5195,3000 v2(5275,2920)
XTAL1: C33.1 U3.7 XT.1 | length 412.7
  Top Layer w10: U3.7 4623.15,3038.15 4650,3065 4650,3180 4663.6,3193.6 XT.1 4839.94,3193.6 C33.1
XTAL2: C32.1 U3.8 XT.2 | length 578.3
  Top Layer w10: U3.8 4569.29,3349.29 4613.6,3393.6 XT.2 4841.43,3393.6 C32.1
pads on no net: C22.0 C31.0 C31.1@4380.79,2992.6 C31.1@4380.79,2992.59 C31.1@4451.65,2992.6 C31.1@4451.66,2992.59 C32.0 C33.0 C34.0 C34.1@4049.99,2934.57 C34.1@4049.99,3005.44 C34.1@4050,2934.57 C34.1@4050,3005.43 C35.0 C35.1@4715.82,2922.32 C35.1@4715.82,2993.19 C35.1@4715.83,2922.32 C35.1@4715.83,2993.19 C36.0 C37.0 C37.1@4129.99,2934.57 C37.1@4129.99,3005.44 C37.1@4130,2934.57 C37.1@4130,3005.43 C41.0 C41.1@4729.99,2699.57 C41.1@4729.99,2770.44 C41.1@4730,2699.57 C41.1@4730,2770.43 D22.0 Df1.0 Df2.0 Df3.0 Df4.0 F22.0 FAN1.0 FAN2.0 FAN3.0 FAN4.0 FAN_CON_1.8 FAN_CON_1.10 FAN_CON_1.18 FAN_CON_1.20 R22.0 R22.1@5160.63,3280 R22.1@5160.63,3280.01 R22.1@5239.37,3280 R22.1@5239.37,3280.01 R31.0 R32.0 R33.0 R34.0 R35.0 R41.0 R42.0 R44.0 Rf1.0 Rf1.1@2866.22,2243.23 Rf1.1@2866.22,2321.97 Rf1.1@2866.23,2243.23 Rf1.1@2866.23,2321.97 Rf2.0 Rf2.1@2851.22,1818.23 Rf2.1@2851.22,1896.97 Rf2.1@2851.23,1818.23 Rf2.1@2851.23,1896.97 Rf3.0 Rf3.1@2871.22,2943.23 Rf3.1@2871.22,3021.97 Rf3.1@2871.23,2943.23 Rf3.1@2871.23,3021.97 Rf4.0 Rf4.1@2866.22,2593.23 Rf4.1@2866.22,2671.97 Rf4.1@2866.23,2593.23 Rf4.1@2866.23,2671.97 Rs1.0 Rs2.0 Rs3.0 Rs4.0 U3.1 U3.2 U3.9 U3.10 U3.19 U3.22 U3.32

## Polygon pours and split planes (outlines as drawn)
GND on Top Layer "Top Layer-No Net" (solid, remove dead copper, pour order 4): 3650,3650 5750,3650 5900,3500 5900,1800 5900,1750 5800,1650 4000,1650 4000,1750 3650,2100
GND on Bottom Layer "Top Layer-No Net" (solid, remove dead copper, pour order 6): 5800,1650 5900,1750 5900,3500 5750,3650 3650,3650 3650,2000 4000,1650

## Keep-outs
Keep-Out Layer:
  the board outline again, w5.91

## Other copper
Top Layer:
  rectangle net PGND: 3025,1675 3825,1800
  region net FAN2_OUT: 2550,2150 2550,1650 2100,1650 2100,2000 2250,2150
  region net FAN1_OUT: 2050,1700 2050,2250 2100,2300 2550,2300 2550,2500 1850,2500 1700,2350 1700,1700
  region net FAN4_OUT: 2400,2850 2250,2850 2250,2700 2400,2700
  region net FAN3_OUT: 2400,3200 2250,3200 2250,3050 2400,3050
Bottom Layer:
  rectangle net PGND: 3025,1675 3825,1800
  region net FAN4_OUT: 2550,1650 2550,2800 2500,2850 2250,2850 2250,2700 2350,2700 2400,2650 2400,1800 2150,1800 2100,1750 2100,1650
  region net FAN3_OUT: 2050,2950 2100,3000 2450,3000 2450,3200 2000,3200 1950,3150 1950,1800 1650,1800 1600,1750 1600,1650 2050,1650

## Dimensions
1496.06,1220.47 to 5944.88,1259.84 on Top Overlay
1377.95,3740.16 to 1338.58,1574.8 on Top Overlay

## Text inside footprints (layer, text, board x,y; h text height)
ISP: Top Overlay "4" at 3910,3240 h50 r270; Top Overlay "1" at 3810,3220 h50 r270; Top Overlay "3" at 3810,2860 h50 r270; Top Overlay "6" at 3910,2860 h50 r270